# Altium PCB PCB2.PcbDoc (part 1 of 2)
Units mil, origin at the board's own origin, x right, y up, seen from the top; angles counter-clockwise.
Board outline 35165 x 15285 mil, 2 copper layers (Top Layer, Bottom Layer); 223 components, 120 nets, 681 pads, 228 vias.
Unrouted connection lines stored in the file: 6.
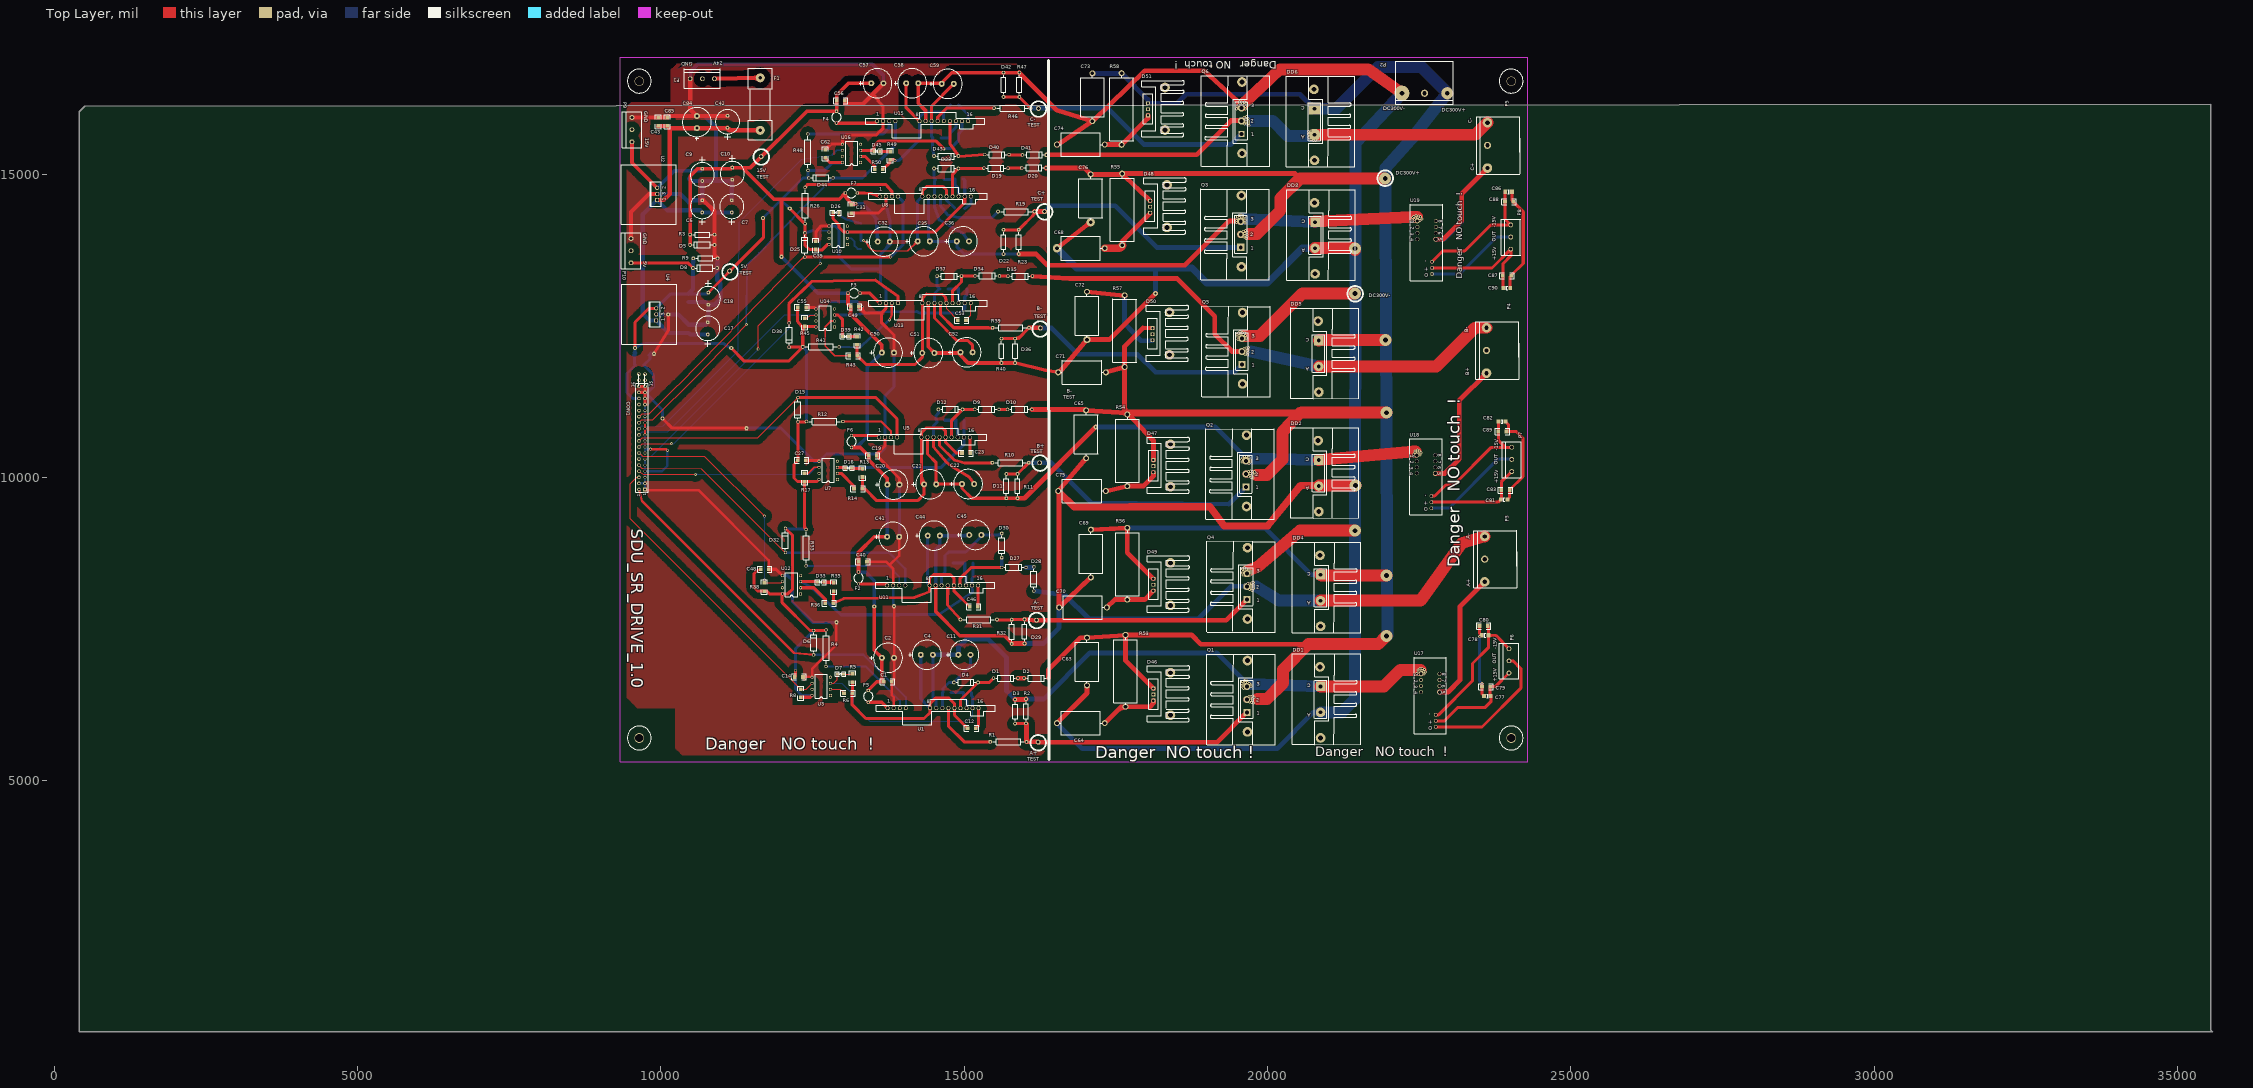
[diagram p0: Top Layer view]
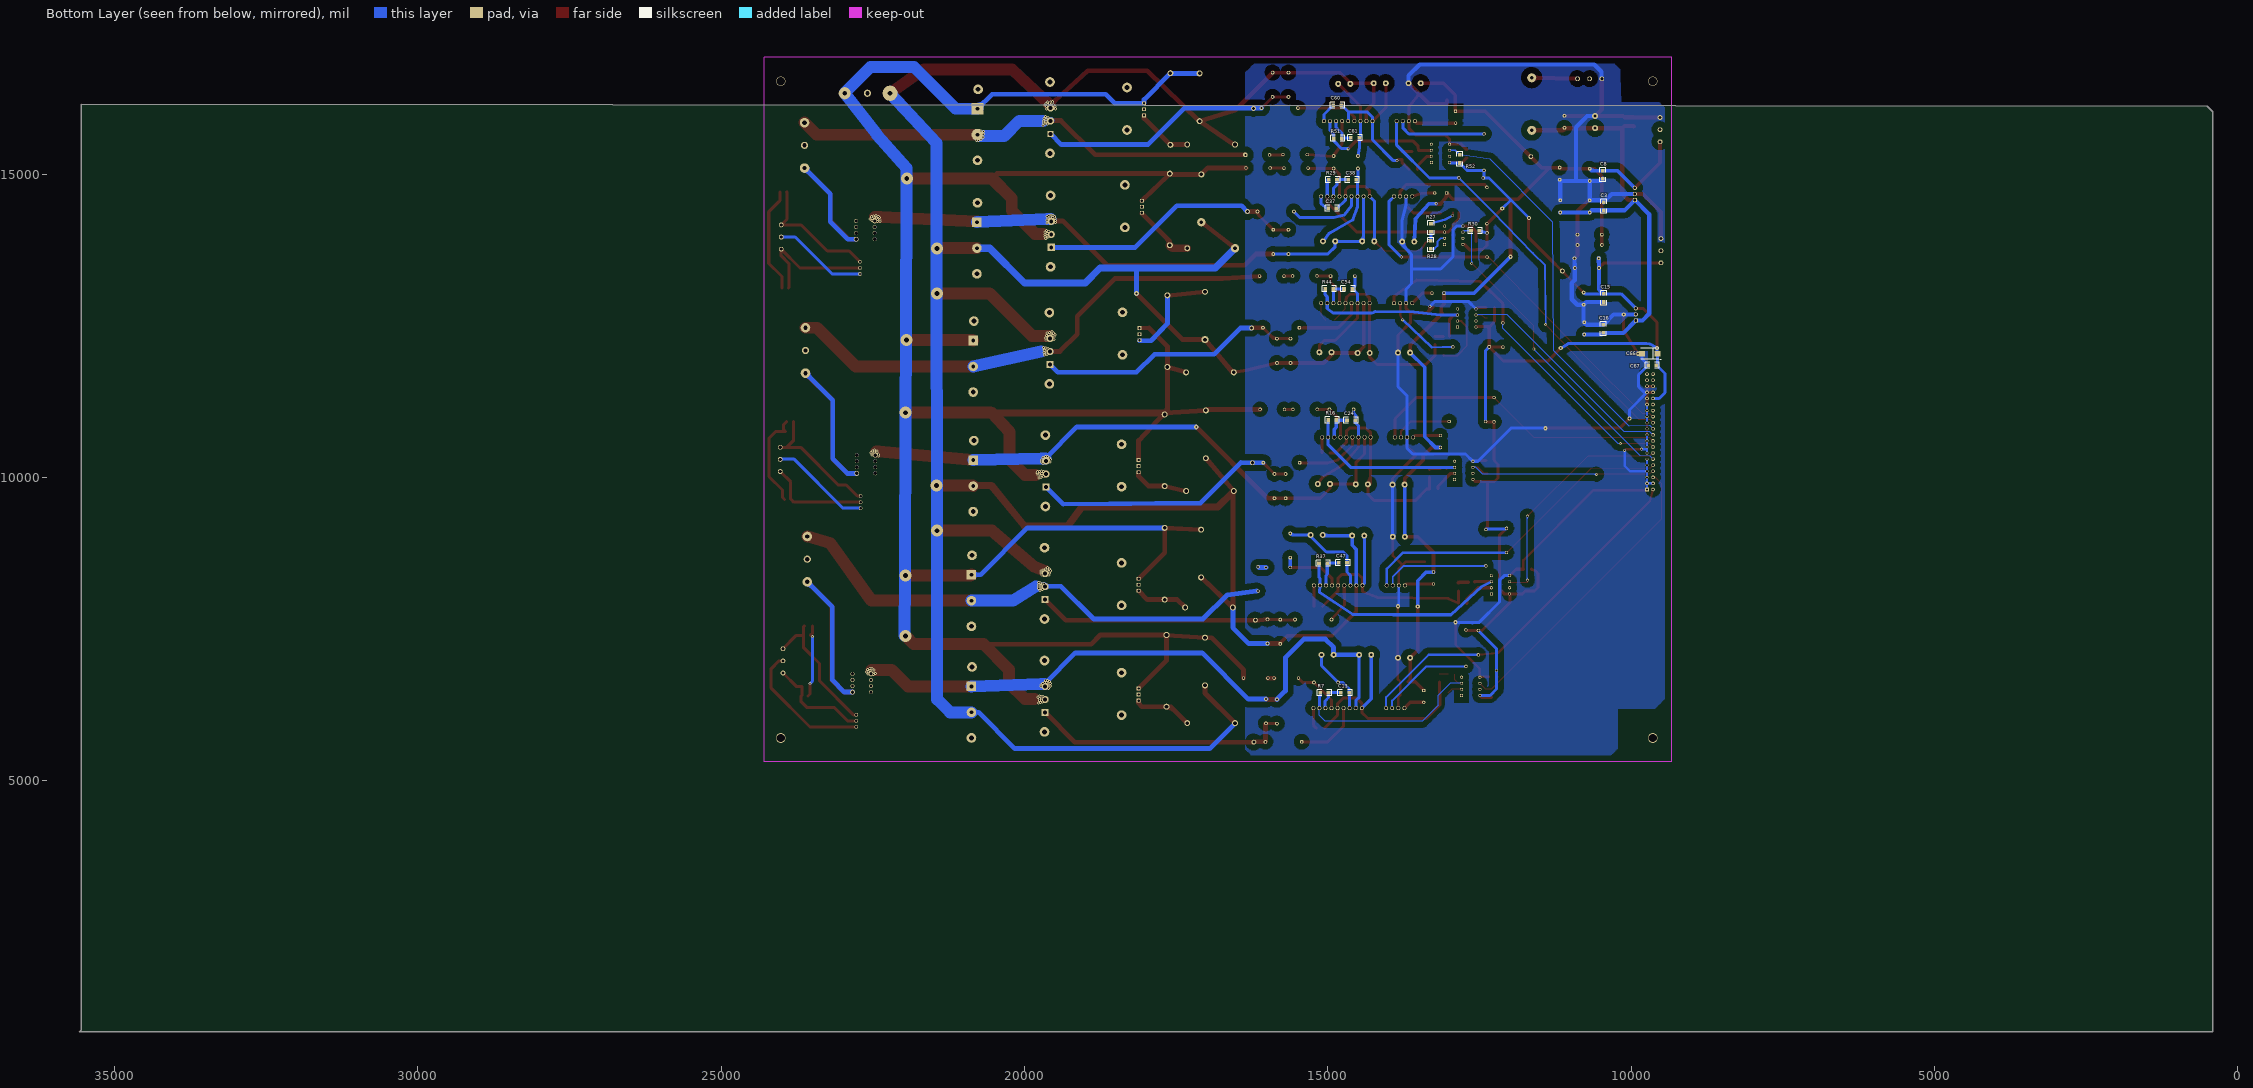
[diagram p1: Bottom Layer view, seen from below]

## Layer stack, top to bottom
Top Layer: signal copper 1.4
Dielectric: dielectric 12.6, FR-4, Dk 4.8
Bottom Layer: signal copper 1.4

## Board outline
505,16120 415,16030 415,865 35580,865 35550,895 35550,16150

## Design rules (kind name [scope] priority, off if disabled: settings)
Clearance [All] p1: gap=20
ComponentClearance [All] p1 off: gap=10 collisioncheckmode=3 verticalgap=10 showdistances=FALSE
HoleToHoleClearance [All] p1 off: gap=10 allowstackedmicrovias=TRUE
MinimumSolderMaskSliver [All] p1 off: minsoldermaskwidth=10
PlaneClearance [All] p1: clearance=30
PlaneConnect [All] p1: planeconnectstyle=Direct reliefexpansion=20 reliefentries=4 reliefconductorwidth=10 reliefairgap=10
PolygonConnect [All] p1: connectstyle=Direct reliefconductorwidth=10 reliefentries=4 polygonreliefangle="90 Angle" airgapwidth=10
RoutingVias [All] p1: holewidth=28 width=50 viastyle="Through Hole" minholewidth=28 minwidth=50 maxholewidth=50 maxwidth=100
SilkToSilkClearance [All] p1 off: silktosilkclearance=10
SilkToSolderMaskClearance SilkscreenOverComponentPads [IsPad] p1 off: minsilkscreentomaskgap=10 clearancetoexposedcopper=TRUE
SolderMaskExpansion [All] p1: expansion=4
UnConnectedPin [All] p1 off:
Width [All] p1: maxlimit=300 minlimit=10 preferedwidth=50 minimp=50.000000 maximp=50.000000 favimp=50.000000
21 further rules are at their usual default settings.

## Classes and differential pairs
component class main1: C63 C64 C65 C68 C69 C70 C71 C72 C73 C74 C75 C76 C77 C78 C79 C80 C81 C82 C83 C86 C87 C88 C89 C90 D46 D47 D48 D49 D50 D51 DD1 DD2 DD3 DD4 DD5 DD6 P2 P3 P4 P5 P6 P7 P8 Q1 Q2 Q3 Q4 Q5 Q6 R53 R54 R55 R56 R57 R58 U17 U18 U19
component class driveIII: C40 C41 C42 C43 C44 C45 C46 C47 C48 C49 C50 C51 C52 C53 C54 C55 C56 C57 C58 C59 C60 C61 C62 C66 C67 C84 C85 CON1 D27 D28 D29 D30 D32 D33 D34 D35 D36 D37 D38 D39 D40 D41 D42 D43 D44 D45 F1 F2 F3 F4 P1 R31 R32 R33 R35 R36 R37 R38 R39 R40 R41 R42 R43 R44 R45 R46 R47 R48 R49 R50 R51 R52 U11 U12 U13 U14 U15 U16
component class driveII: C1 C2 C3 C4 C6 C7 C8 C9 C10 C11 C12 C13 C14 C15 C16 C17 C18 C19 C20 C21 C22 C23 C24 C27 C31 C32 C35 C36 C37 C38 C39 D1 D2 D3 D4 D5 D6 D7 D8 D9 D10 D11 D12 D15 D16 D19 D20 D22 D23 D25 D26 F5 F6 F7 P9 P10 R1 R2 R3 R4 R5 R6 R7 R8 R9 R10 R11 R12 R13 R14 R16 R17 R19 R23 R26 R27 R28 R29 R30 U1 U2 U3 U4 U5 U7 U8 U10 U?

## Components (designator, comment, footprint, x,y, rotation, side; value= is the part's Value field where it differs from the comment)
C1 "Cap" 1206#1 13805,6635 r180 top
C2 "Cap Pol1" 电解电容1000uF#1 13645,7030 r0 top
C3 "Cap" 1206#1 10455,14540 r270 bottom
C4 "Cap Pol1" 电解电容1000uF#1 14285,7080 r0 top
C6 "Cap Pol1" 电解电容470uf 10685,14370 r270 top
C7 "Cap Pol1" 电解电容470uf 11170,14370 r270 top
C8 "Cap" 1206#1 10470,14925 r90 bottom
C9 "Cap Pol1" 电解电容470uf 10685,15090 r90 top
C10 "Cap Pol1" 电解电容470uf 11180,15110 r90 top
C11 "Cap Pol1" 电解电容1000uF#1 14905,7080 r0 top
C12 "预留" 1206#1 15055,5870 r0 top
C13 "预留" 1206#1 14650,6455 r0 bottom
C14 "Cap" 1206#1 12210,6715 r0 top
C15 "Cap" 1206#1 10455,12895 r90 bottom
C16 "Cap" 1206#1 10460,12520 r270 bottom
C17 "Cap Pol1" 电解电容470uf 10775,12360 r270 top
C18 "Cap Pol1" 电解电容470uf 10785,13050 r90 top
C19 "Cap" 1206#1 13560,10360 r180 top
C20 "Cap Pol1" 电解电容1000uF#1 13735,9885 r0 top
C21 "Cap Pol1" 电解电容1000uF#1 14340,9890 r0 top
C22 "Cap Pol1" 电解电容1000uF#1 14965,9895 r0 top
C23 "预留" 1206#1 14965,10405 r0 top
C24 "预留" 1206#1 14550,10945 r0 bottom
C27 "Cap" 1206#1 12255,10285 r0 top
C31 "Cap" 1206#1 13140,14360 r90 top
C32 "Cap Pol1" 电解电容1000uF#1 13575,13890 r0 top
C35 "Cap Pol1" 电解电容1000uF#1 14235,13895 r0 top
C36 "Cap Pol1" 电解电容1000uF#1 14880,13895 r0 top
C37 "预留" 1206#1 14860,14440 r0 bottom
C38 "预留" 1206#1 14530,14910 r0 bottom
C39 "Cap" 1206#1 12555,13760 r90 top
C40 "Cap" 1206#1 13400,8615 r180 top
C41 "Cap Pol1" 电解电容1000uF#1 13730,9025 r0 top
C42 "Cap Pol1" 电解电容470uf 11100,15765 r270 top
C43 "Cap" 1206#1 9960,15935 r270 top
C44 "Cap Pol1" 电解电容1000uF#1 14400,9045 r0 top
C45 "Cap Pol1" 电解电容1000uF#1 15085,9055 r0 top
C46 "预留" 1206#1 15090,7875 r0 top
C47 "预留" 1206#1 14685,8595 r0 bottom
C48 "Cap" 1206#1 11645,8490 r0 top
C49 "Cap" 1206#1 13265,12815 r180 top
C50 "Cap Pol1" 电解电容1000uF#1 13645,12060 r0 top
C51 "Cap Pol1" 电解电容1000uF#1 14310,12055 r0 top
C52 "Cap Pol1" 电解电容1000uF#1 14940,12065 r0 top
C53 "预留" 1206#1 14895,12595 r0 top
C54 "预留" 1206#1 14600,13110 r0 bottom
C55 "Cap" 1206#1 12260,12805 r0 top
C56 "Cap" 1206#1 13035,16215 r180 top
C57 "Cap Pol1" 电解电容1000uF#1 13470,16500 r0 top
C58 "Cap Pol1" 电解电容1000uF#1 14045,16500 r0 top
C59 "Cap Pol1" 电解电容1000uF#1 14630,16490 r0 top
C60 "预留" 1206#1 14775,16140 r0 bottom
C61 "预留" 1206#1 14485,15600 r0 bottom
C62 "Cap" 1206#1 12710,15270 r90 top
C63 "Cap" 无感电容15*6#1 17025,6575 r90 top
C64 "Cap" 无感电容15*6#1 16530,5955 r0 top
C65 "Cap" 无感电容15*6#1 17010,10320 r90 top
C66 "Cap Pol1" 7343 9695,12040 r0 bottom
C67 "Cap" 1206#1 9720,11855 r180 bottom
C68 "Cap" 无感电容15*6#2 16530,13780 r0 top
C69 "Cap" 无感电容15*6#1 17090,8355 r90 top
C70 "Cap" 无感电容15*6#1 16565,7860 r0 top
C71 "Cap" 无感电容15*6#1 16550,11735 r0 top
C72 "Cap" 无感电容15*6#3 17025,12275 r90 top
C73 "Cap" 无感电容15*6#1 17115,15875 r90 top
C74 "Cap" 无感电容15*6#1 16530,15490 r0 top
C75 "Cap" 无感电容15*6#1 16550,9780 r0 top
C76 "Cap" 无感电容15*6#2 17085,14210 r90 top
C77 "Cap Pol1" 1206#2 23625,6400 r180 top
C78 "Cap Pol1" 1206#2 23585,7400 r0 top
C79 "Cap" 1206#1 23535,6555 r0 top
C80 "Cap" 1206#1 23630,7555 r180 top
C81 "Cap Pol1" 1206#2 23900,9640 r0 top
C82 "Cap Pol1" 1206#2 23865,10925 r180 top
C83 "Cap" 1206#1 23990,9795 r180 top
C84 "Cap Pol1" 电解电容1000uF#2 10595,15760 r90 top
C85 "Cap" 1206#1 10110,15935 r270 top
C86 "Cap Pol1" 1206#2 23975,14710 r180 top
C87 "Cap" 1206#1 24015,13330 r180 top
C88 "Cap" 1206#1 23915,14545 r0 top
C89 "Cap" 1206#1 23805,10760 r0 top
C90 "Cap Pol1" 1206#2 23945,13125 r0 top
CON1 "Header 18X2" HDR2X18 9740,9805 r90 top
D1 "FR107" DIODE-0.4#1 15685,6695 r0 top
D2 "FR107" DIODE-0.4#1 16190,6695 r0 top
D3 "1.5KE18CA" AXIAL0.4 15840,6345 r270 top
D4 "1N4751" DIODE0.4 14830,6625 r0 top
D5 "Diode 1N4007" DIODE0.4 10885,13835 r180 top
D6 "Diode 1N4007" DIODE-0.4#1 12520,7280 r90 top
D7 "LED" 0805D 12985,6715 r180 top
D8 "Diode 1N4007" DIODE0.4 10930,13455 r180 top
D9 "FR107" DIODE-0.4#1 15375,11125 r0 top
D10 "FR107" DIODE-0.4#1 15915,11125 r0 top
D11 "1.5KE18CA" AXIAL0.4 15695,9660 r90 top
D12 "1N4751" DIODE0.4 14575,11125 r0 top
D15 "Diode 1N4007" DIODE-0.4#1 12260,11120 r270 top
D16 "LED" 0805D 13120,10110 r180 top
D19 "FR107" DIODE-0.4#1 15525,15100 r0 top
D20 "FR107" DIODE-0.4#1 16150,15105 r0 top
D22 "1.5KE18CA" AXIAL0.4 15650,13685 r90 top
D23 "1N4751" DIODE0.4 14505,15095 r0 top
D25 "Diode 1N4007" DIODE-0.4#1 12375,13835 r90 top
D26 "LED" 0805D 12910,14320 r180 top
D27 "FR107" DIODE-0.4#1 15820,8520 r0 top
D28 "FR107" DIODE-0.4#1 16150,8330 r270 top
D29 "1.5KE18CA" AXIAL0.4 15995,7265 r90 top
D30 "1N4751" DIODE0.4 15620,9080 r270 top
D32 "Diode 1N4007" DIODE-0.4#1 12055,8965 r90 top
D33 "LED" 0805D 12660,8230 r180 top
D34 "FR107" DIODE-0.4#1 15380,13325 r0 top
D35 "FR107" DIODE-0.4#1 15925,13320 r0 top
D36 "1.5KE18CA" AXIAL0.4 15840,11890 r90 top
D37 "1N4751" DIODE0.4 14555,13320 r0 top
D38 "Diode 1N4007" DIODE-0.4#1 12115,12350 r270 top
D39 "LED" 0805D 13070,12280 r180 top
D40 "FR107" DIODE-0.4#1 15540,15325 r0 top
D41 "FR107" DIODE-0.4#2 16160,15320 r0 top
D42 "1.5KE18CA" AXIAL0.4 15650,16675 r270 top
D43 "1N4751" DIODE0.4 14505,15300 r0 top
D44 "Diode 1N4007" DIODE-0.4#1 12640,14940 r180 top
D45 "LED" 0805D 13585,15330 r180 top
D46 "MUR860 8A/600V" TO-220_SANRE 18120,6525 r180 top
D47 "MUR860 8A/600V" TO-220_SANRE 18120,10290 r180 top
D48 "MUR860 8A/600V" TO-220_SANRE 18065,14565 r180 top
D49 "MUR860 8A/600V" TO-220_SANRE 18120,8335 r180 top
D50 "MUR860 8A/600V" TO-220_SANRE 18105,12465 r180 top
D51 "MUR860 8A/600V" TO-220_SANRE 18030,16170 r180 top
DD1 "RURG8060" TO247dio#1 20865,6560 r180 top
DD2 "RURG8060" TO247dio#1 20835,10290 r180 top
DD3 "RURG8060" TO247dio#1 20775,14210 r180 top
DD4 "RURG8060" TO247dio#1 20865,8400 r180 top
DD5 "RURG8060" TO247dio#1 20835,12260 r180 top
DD6 "RURG8060" TO247dio#2 20765,16080 r180 top
F1 "Fuse 1　4A" FUSE 11640,16590 r270 top
F2 "Fuse 1　2A" CAPR5-4X5 13260,8345 r270 top
F3 "Fuse 1　2A" CAPR5-4X5 13185,13040 r0 top
F4 "Fuse 1　2A" CAPR5-4X5 12895,15940 r270 top
F5 "Fuse 1　2A" CAPR5-4X5 13420,6395 r270 top
F6 "Fuse 1　2A" CAPR5-4X5 13145,10595 r90 top
F7 "Fuse 1　2A" CAPR5-4X5 13140,14690 r0 top
P1 "Header 3" PHENOX-3 10485,16575 r0 top
P2 "Header 3" 端子9.5mm-3#1 22925,16705 r180 top
P3 "Header 3" 端子9.5mm-3#2 23950,8320 r90 top
P4 "Header 3" 端子9.5mm-3#2 23980,11760 r90 top
P5 "Header 3" 端子9.5mm-3#3 23995,15140 r90 top
P6 "SEN_A" PHENOX-3 23980,6780 r90 top
P7 "SEN_B" PHENOX-3 24025,10100 r90 top
P8 "SEN_C" PHENOX-3 24010,13765 r90 top
P9 "预留不焊" PHENOX-3 9525,15535 r90 top
P10 "预留不焊" PHENOX-3 9510,13540 r90 top
Q1 "IGBT-N" TO247#1 19660,6130 r0 top
Q2 "IGBT-N" TO247#1 19645,9845 r0 top
Q3 "IGBT-N" TO247#2 19560,13795 r0 top
Q4 "IGBT-N" TO247#3 19660,7990 r0 top
Q5 "IGBT-N" TO247#1 19580,11865 r0 top
Q6 "IGBT-N" TO247#4 19570,15665 r0 top
R1 "5R" AXIAL0.6 15430,5645 r0 top
R2 "10K" AXIAL0.4 16020,6350 r270 top
R3 "Res2" AXIAL0.4 10885,14005 r180 top
R4 "100R" AXIAL-0.6#1 12725,7190 r90 top
R5 "Res2" 1206#1 13160,6765 r270 top
R6 "Res2" 1206#1 13020,6445 r0 top
R7 "预留" 1206#1 15125,6455 r180 bottom
R8 "Res2" 1206#1 12305,6515 r270 top
R9 "Res2" AXIAL0.4 10935,13615 r180 top
R10 "5R" AXIAL0.6 15465,10245 r0 top
R11 "10K or更大？33k？" AXIAL0.4 15880,9660 r90 top
R12 "Res2" AXIAL-0.6#1 12700,10925 r180 top
R13 "Res2" 1206#1 13325,10145 r270 top
R14 "Res2" 1206#1 13185,9815 r0 top
R16 "预留" 1206#1 14995,10950 r180 bottom
R17 "Res2" 1206#1 12370,10070 r270 top
R19 "5R" AXIAL0.6 15560,14385 r0 top
R23 "10K or更大？33k？" AXIAL0.4 15900,13685 r90 top
R26 "Res2" AXIAL-0.6#1 12380,14485 r270 top
R27 "Res2" 1206#1 13300,14185 r270 bottom
R28 "Res2" 1206#1 13305,13770 r90 bottom
R29 "预留" 1206#1 14985,14910 r180 bottom
R30 "Res2" 1206#1 12640,14070 r180 bottom
R31 "5R" AXIAL0.6 14940,7660 r0 top
R32 "10K or更大？33k？" AXIAL0.4 15785,7260 r90 top
R33 "Res2" AXIAL-0.6#1 12395,8845 r90 top
R35 "Res2" 1206#1 12850,8265 r270 top
R36 "Res2" 1206#1 12710,7930 r0 top
R37 "预留" 1206#1 15145,8590 r180 bottom
R38 "Res2" 1206#1 11705,8265 r270 top
R39 "5R" AXIAL0.6 15470,12470 r0 top
R40 "10K or更大？33k？" AXIAL0.4 15615,11890 r90 top
R41 "Res2" AXIAL-0.6#2 12640,12155 r180 top
R42 "Res2" 1206#1 13235,12325 r270 top
R43 "Res2" 1206#1 13105,12010 r0 top
R44 "预留" 1206#1 15045,13110 r180 bottom
R45 "Res2" 1206#1 12375,12625 r270 top
R46 "5R" AXIAL0.6 15495,16090 r0 top
R47 "10K or更大？33k？" AXIAL0.4 15910,16675 r270 top
R48 "Res2" AXIAL-0.6#1 12425,15365 r270 top
R49 "Res2" 1206#1 13780,15375 r270 top
R50 "Res2" 1206#1 13525,15080 r0 top
R51 "预留" 1206#1 14905,15590 r180 bottom
R52 "Res2" 1206#1 12825,15320 r270 bottom
R53 "5.2R" 水泥电阻22*9.5 17660,6225 r90 top
R54 "5.2R" 水泥电阻22*9.5 17690,9860 r90 top
R55 "5.2R" 水泥电阻22*9.5 17605,13830 r90 top
R56 "5.2R" 水泥电阻22*9.5 17690,7990 r90 top
R57 "5.2R" 水泥电阻22*9.5 17645,13005 r270 top
R58 "5.2R" 水泥电阻22*9.5 17595,15485 r90 top
U1 "QP12W05KS-37" QP12W05KS37 13390,5700 r0 top
U2 "L7815CV" TO220ABN 9940,14675 r90 top
U3 "TLP550" DIP8 12795,6410 r180 top
U4 "L7805CV" TO220ABN 9925,12690 r90 top
U5 "QP12W05KS-37" QP12W05KS37 13245,10165 r0 top
U7 "TLP550" DIP8 12910,9970 r180 top
U8 "QP12W05KS-37" QP12W05KS37 13260,14135 r0 top
U10 "TLP550" DIP8 13075,13845 r180 top
U11 "QP12W05KS-37" QP12W05KS37 13380,7725 r0 top
U12 "TLP550" DIP8 12305,8085 r180 top
U13 "QP12W05KS-37" QP12W05KS37 13260,12375 r0 top
U14 "TLP550" DIP8 12860,12480 r180 top
U15 "QP12W05KS-37" QP12W05KS37 13215,15375 r0 top
U16 "TLP550" DIP8 13295,15195 r180 top
U17 "电流传感器1" 电流传感器1 22530,6765 r270 top
U18 "电流传感器1" 电流传感器1 22460,10370 r270 top
U19 "电流传感器1" 电流传感器1 22470,14230 r270 top

## Footprints (in the part's own frame and the unit in brackets; to place one, negate y for a bottom-side part, rotate by r counter-clockwise, add the part's x,y. Pads: shape width x height; smd on the part's side, far side on the other; paste and mask are expansions set on the pad)
0805D [mil]
  rect 50x50 smd: A(-27,-48) K(73,-48)
  silkscreen extent -67,-88 113,-8
1206#1 [mil]
  rect 60x60 smd: 1(0,0) 2(135,0)
  silkscreen extent -50,-50 185,50
1206#2 [mil] "Chip Capacitor; Body 3.2 x 1.6 mm (LxW typ)"
  rect 62.99x70.87 smd: 1(-55.12,0) 2(55.12,0)
  silkscreen extent -12,-31 12,31
7343 [mm] "Capacitor, SM Tantalum; Body 7.3 x 4.3 mm (LxW typ)"
  rect 2.6x2.4 smd: 1(-3.2,0) 2(3.2,0)
  silkscreen extent -4.57,-2.3 3.8,2.42
AXIAL0.4 [mil]
  round 62 hole 32: 1(0,0) 2(400,0)
  silkscreen extent 40,-40 360,40
AXIAL0.6 [mil]
  round 62 hole 32: 1(0,0) 2(600,0)
  silkscreen extent 40,-50 560,50
AXIAL-0.6#1 [mm] "Axial Device, Thru-Hole; 2 Leads; 0.6 in Pin Spacing"
  round 1.4 hole 0.85: 1(-7.62,0) 2(7.62,0)
  silkscreen extent -6.6,-1.27 6.6,1.27
AXIAL-0.6#2 [mm] "Axial Device, Thru-Hole; 2 Leads; 0.6 in Pin Spacing"
  round 1.4 hole 0.85: 1(-7.62,0)
  round 1.651 hole 0.85: 2(7.62,0)
  silkscreen extent -6.6,-1.27 6.6,1.27
CAPR5-4X5 [mm] "Capacitor; 2 Leads"
  rect 1.35x1.35 hole 0.8: 1(-2.5,0)
  round 1.35 hole 0.8: 2(2.5,0)
  silkscreen extent -1.69,-2 1.82,2
DIODE0.4 [mil]
  round 62 hole 32: A(0,0) K(400,0)
  silkscreen extent 40,-50 360,50
DIODE-0.4#1 [mm] "Diode, Thru-Hole; 2 Leads; 0.4 in Pin Spacing"
  round 1.4 hole 0.85: 1(-5.08,0) 2(5.08,0)
  silkscreen extent -4.06,-1.27 4.06,1.27
DIODE-0.4#2 [mm] "Diode, Thru-Hole; 2 Leads; 0.4 in Pin Spacing"
  round 1.4 hole 0.85: 1(-5.08,0)
  round 2 hole 0.85: 2(5.08,0)
  silkscreen extent -4.06,-1.27 4.06,1.27
DIP8 [mil]
  rect 50x50 hole 32: 1(0,0)
  round 50 hole 32: 2(0,-100) 3(0,-200) 4(0,-300) 5(300,-300) 6(300,-200) 7(300,-100) 8(300,0)
  silkscreen extent 50,-350 250,50
FUSE [mm]
  round 3.81 hole 1.5: 1(0,0) 2(22,0)
  silkscreen extent -4,-5 26,5
HDR2X18 [mm] "Connector; Header; 18x2 Position"
  rect 1.5x1.5 hole 0.9: 1(0,0)
  round 1.5 hole 0.9: 2(0,2.54) 3(2.54,0) 4(2.54,2.54) 6(5.08,2.54) 8(7.62,2.54) 10(10.16,2.54) 12(12.7,2.54) 14(15.24,2.54) 16(17.78,2.54) 18(20.32,2.54) 20(22.86,2.54) 22(25.4,2.54) 24(27.94,2.54) 26(30.48,2.54) 28(33.02,2.54) 29(35.56,0) 30(35.56,2.54) 31(38.1,0) 32(38.1,2.54) 33(40.64,0) 34(40.64,2.54) 35(43.18,0) 36(43.18,2.54)
  round 1.143 hole 0.9: 5(5.08,0) 7(7.62,0) 9(10.16,0) 11(12.7,0) 13(15.24,0) 15(17.78,0) 17(20.32,0) 19(22.86,0) 21(25.4,0) 23(27.94,0) 25(30.48,0) 27(33.02,0)
  silkscreen extent -1.27,-1.27 44.45,3.81
PHENOX-3 [mm]
  round 2 hole 1.3: 1(0,0) 2(5.08,0) 3(10.16,0)
  silkscreen extent -2.54,-4.06 12.5,4.06
QP12W05KS37 [mm] "IGBT Drive"
  round 1.7 hole 1.3: 1(8.89,12.7) 2(11.43,12.7) 3(13.97,12.7) 4(16.51,12.7) 8(26.67,12.7) 9(29.21,12.7) 10(31.75,12.7) 11(34.29,12.7) 12(36.83,12.7) 13(39.37,12.7) 14(41.91,12.7) 15(44.45,12.7) 16(46.99,12.7)
  silkscreen extent 4.19,5.71 53.97,16.51
TO220ABN [mm] "TO, Thru-Hole, Vertical, Heatsink Mounted; 3 In-Line Leads; Pitch 2.54 mm; Pin sequence 1, 3, 2"
  rect 1.7x1.7 hole 1.1: 1(-2.54,0)
  round 1.7 hole 1.1: 2(2.54,0) 3(0,0)
  silkscreen extent -5.2,-1.7 5.2,2.9
TO247#1 [mm]
  rect 3x3 hole 1.6: 1(0,0)
  round 3 hole 1.6: 2(0,5.44) 3(0,10.88)
  round 4.064 hole 2.032: ""(0.254,-8.128) ""(0.254,21.717)
  silkscreen extent -16.76,-13.69 11.81,24.44
TO247#2 [mm]
  rect 3.04x3.04 hole 1.6: 1(0,0)
  round 3.04 hole 1.6: 2(0,5.44) 3(0,10.88)
  round 4.064 hole 2.032: ""(0.254,-8.128) ""(0.254,21.717)
  silkscreen extent -16.76,-13.69 11.81,24.44
TO247#3 [mm]
  rect 3x3 hole 1.6: 1(0,0)
  round 3 hole 1.6: 2(0,5.44)
  round 3.048 hole 1.6: 3(0,10.88)
  round 4.064 hole 2.032: ""(0.254,-8.128) ""(0.254,21.717)
  silkscreen extent -16.76,-13.69 11.81,24.44
TO247#4 [mm]
  rect 2.4x2.4 hole 1.6: 1(0,0)
  round 3.048 hole 1.6: 2(0,5.44) 3(0,10.88)
  round 4.064 hole 2.032: ""(0.254,-8.128) ""(0.254,21.717)
  silkscreen extent -16.76,-13.69 11.81,24.44
TO247dio#1 [mil]
  round 157.48 hole 62.99: A(-10,428.35)
  rect 157.48x157.48 hole 62.99: C(-10,0)
  round 160 hole 80: ""(-10,850) ""(0,-320)
  silkscreen extent -670,-539 455,962
TO247dio#2 [mil]
  round 196.85 hole 62.99: A(-10,428.35)
  rect 196.85x196.85 hole 62.99: C(-10,0)
  round 160 hole 80: ""(-10,850) ""(0,-320)
  silkscreen extent -670,-539 455,962
TO-220_SANRE [mil]
  rect 62x62 hole 39.37: 1(0,0) 2(0,100) 3(0,200)
  round 160 hole 80: ""(-280,440) ""(-280,-260)
  silkscreen extent -600,-375 105,550
无感电容15*6#1 [mm]
  round 2.5 hole 1.5: 1(0,0) 2(20,0)
  silkscreen extent 1.02,-5 18.92,5
无感电容15*6#2 [mm]
  round 3.5 hole 1.5: 1(0,0)
  round 2.5 hole 1.5: 2(20,0)
  silkscreen extent 1.02,-5 18.92,5
无感电容15*6#3 [mm]
  round 3 hole 1.5: 1(0,0)
  round 2.5 hole 1.5: 2(20,0)
  silkscreen extent 1.02,-5 18.92,5
水泥电阻22*9.5 [mm]
  round 2.5 hole 1.5: 1(0,0) 2(30,0)
  silkscreen extent 0.89,-5 28.83,5
电流传感器1 [mm]
  round 1.5 hole 1: 0(22.2,6.15) A(19.66,6.15) C(17.12,6.15)
  round 2 hole 1.4: 1(0,0) 5(7.62,7.75)
  round 1.6 hole 1.4: 2(2.54,0) 3(5.08,0) 4(7.62,0) 6(5.08,7.75) 7(2.54,7.75) 8(0,7.75)
  silkscreen extent -6.9,-2.92 25.02,10.67
电解电容470uf [mil] "5.04mm"
  round 62 hole 28: 1(0,0) 2(-200,0)
  silkscreen extent -300,-200 200,200
电解电容1000uF#1 [mm]
  round 2.5 hole 1.1: 1(0,0) 2(5.08,0)
  silkscreen extent -5.08,-6.1 8.64,6.1
电解电容1000uF#2 [mm]
  round 2.5 hole 1.2: 1(0,0) 2(5.08,0)
  silkscreen extent -5.08,-6.1 8.64,6.09
端子9.5mm-3#1 [mm]
  round 5.08 hole 2: 1(-0.966,9.398)
  round 3 hole 1.8: 2(8.534,9.398)
  round 6.35 hole 2: 3(18.034,9.398)
  silkscreen extent -3.47,-4.1 20.59,13.9
端子9.5mm-3#2 [mm]
  round 4 hole 1.8: 1(-0.966,9.398) 3(18.034,9.398)
  round 3 hole 1.8: 2(8.534,9.398)
  silkscreen extent -3.47,-4.1 20.59,13.9
端子9.5mm-3#3 [mm]
  round 4 hole 1.8: 1(-0.966,9.398)
  round 3 hole 1.8: 2(8.534,9.398)
  round 4 hole 2: 3(18.034,9.398)
  silkscreen extent -3.47,-4.1 20.59,13.9

## Part data
C1 C3 C8 C14 C15 C16 C19 C27 C31 C39 C40 C43 C48 C49 C55 C56 C62 C63 C64 C65 C67 C68 C69 C70 C71 C72 C73 C74 C75 C76 C79 C80 C83 C85 C87 C88 C89: "Capacitor"
C2 C4 C6 C7 C9 C10 C11 C17 C18 C20 C21 C22 C32 C35 C36 C41 C42 C44 C45 C50 C51 C52 C57 C58 C59 C66 C77 C78 C81 C82 C84 C86 C90: "Polarized Capacitor (Radial)"
C12 C23 C37 C46 C53 C60: library part Cap
C13 C24 C38 C47 C54 C61: library part Cap, "Capacitor"
CON1: "Header, 18-Pin, Dual row"
D1 D2 D5 D6 D8 D9 D10 D15 D19 D20 D25 D27 D28 D32 D34 D35 D38 D40 D41 D44 D46 D47 D48 D49 D50 D51 DD1 DD2 DD3 DD4 DD5 DD6: library part "Diode 1N4148", "High Conductance Fast Diode"
D3 D11 D22 D29 D36 D42: library part D-SMBJ5.0CA, "TVS 18V"
D4 D12 D23 D30 D37 D43: library part ZENER1, "Zener Diode 30V"
D7 D16 D26 D33 D39 D45: library part DIODE1
F1 F2 F3 F4 F5 F6 F7: library part "Fuse 1", "Fuse"
P1 P2 P3 P4 P5: "Header, 3-Pin"
P6 P7 P8 P9 P10: library part "Header 3", "Header, 3-Pin"
Q1 Q2 Q3 Q4 Q5 Q6: "Insulated Gate Bipolar Transistor (N-Channel)"
R1 R2 R4 R7 R10 R11 R16 R19 R23 R29 R31 R32 R37 R39 R40 R44 R46 R47 R51 R53 R54 R55 R56 R57 R58: library part Res2, "Resistor"
R3 R5 R6 R8 R9 R12 R13 R14 R17 R26 R27 R28 R30 R33 R35 R36 R38 R41 R42 R43 R45 R48 R49 R50 R52: "Resistor"
U2: "Positive Voltage Regulator"
U3 U7 U10 U12 U14 U16: library part HCPL4053
U4: library part L7815CV, "Positive Voltage Regulator"

## Free pads (board coordinates)
  round 60 hole 35.43: 0(9639.97,11705.13) 0(9639.98,11605) 0(9739.97,11705.13) 0(9739.98,11605)
  round 80 hole 50: 0(11135,13405) 0(11655,15290) 0(16195,7650) 0(16220,5640) 0(16225,16085) 0(16245,10245) 0(16255,12465) 0(16325,14385)

## Via types
v1: diameter 50, hole 11.81, Top Layer to Bottom Layer, 181 vias
v2: diameter 50, hole 28, Top Layer to Bottom Layer, 18 vias
v3: diameter 70, hole 28, Top Layer to Bottom Layer, 12 vias
v4: diameter 196.85, hole 78.74, Top Layer to Bottom Layer, 9 vias
v5: diameter 157.48, hole 137.8, Top Layer to Bottom Layer, 4 vias
v6: diameter 50, hole 23.62, Top Layer to Bottom Layer, 2 vias
v7: diameter 78.74, hole 28, Top Layer to Bottom Layer, 1 vias
v8: diameter 86.61, hole 28, Top Layer to Bottom Layer, 1 vias

## Nets (pads, with @x,y where several pads share a name; then routed paths per layer and width w, separated by ;. In a path a pad name is that pad's centre, name@x,y a point inside that pad or via, vN(x,y) a via of type N, cw(c..) or ccw(c..) an arc to the next point about the centre after c; other vN are vias at no path point)
+5V: C14.1 C15.2 C18.1 C27.1 C39.1 C48.1 C55.1 C62.1 C66.1 C67.2 CON1.32 D6.2 D8.K D15.2 D25.2 D32.2 D38.2 D44.2 P10.1 pad.0@11135,13405 R4.2 R8.2 R9.2 R12.2 R17.2 R26.2 R30.2 R33.2 R38.2 R41.2 R45.2 R48.2 R52.2 U3.8 U4.2 U7.8 U10.8 U12.8 U14.8 U16.8 | length 23346.8
  Top Layer w50: P10.1@9510,13540 10445,13540 D8.K@10530,13455 ; v3(9575,12135) 9575,12560 9805,12790 U4.2@9925,12790 ; C18.1@10785,13050 11690,13955 v3@11690,14290 ; v3(11160,12135) 11375,11920 12105,11920 R41.2@12335,12150 ; C48.1@11645,8490 11570,8461.88 11535,8415 11535,8190 11595,8130 R38.2@11705,8130 11750,8130 11800,8080 U12.8@12000,8080 ; v3@11677.93,14272.93 cw(c11648.79,14243.79) 11690,14243.79 ; D32.2@12065,9155 12175,9045 12175,8165 12095,8085 U12.8@12005,8085 U12.8@12000,8080 ; D38.2@12115,12150 R41.2@12335,12150 ; v3(12125,14435) 12375,14185 R26.2@12380,14185 D25.2@12375,14035 12375,13835 12450,13760 C39.1@12555,13760 12565,13750 12655,13750 12750,13845 U10.8@12775,13845 ; C14.1@12210,6715 12220,6725 v2(12220,6820) ; C55.1@12250,12805 12250,12580 12320,12490 R45.2@12375,12490 ; R8.2@12305,6380 12465,6380 U3.8@12495,6410 ; 12370,9211.53 ccw(c12461.53,9211.53) R33.2@12396.81,9146.81 ; R33.2@12395,9145 12370,9170 R17.2@12370,9935 ; R12.2@12400,10935 12385,10920 D15.2@12260,10920 12260,10290 C27.1@12255,10285 12255,10275 12195,10215 12195,9995 12255,9935 R17.2@12370,9935 ; U14.8@12560,12480 12550,12490 R45.2@12375,12490 ; U7.8@12610,9970 12575,9935 R17.2@12370,9935 ; 12694.68,7480 ccw(c12694.68,7520.32) R4.2@12723.19,7491.81 ; C62.1@12710,15270 12785,15195 U16.8@12995,15195 ; R4.2@12725,7490 12715,7480 D6.2@12520,7480 12460,7480 12000,7940 U12.8@12000,8080 ; R41.2@12335,12150 R41.2@12340,12155 12340,12455 R45.2@12375,12490 ; 11105.86,13370.86 ccw(c11071.72,13405) 11120,13405 cw(c11071.72,13405) 11105.86,13370.86 ; pad.0@11135,13420 ccw(c11135,13468.28) 11169.14,13434.14 cw(c11135,13468.28) pad.0@11135,13420
  Bottom Layer w50: C66.1@9549.35,12024.27 cw(c9513.94,11988.86) 9564.02,11988.86 ; C66.1@9557.22,12055.73 ccw(c9514.31,12098.64) 9575,12098.64 ; 9564.02,11983.73 cw(c9621.35,11983.73) C66.1@9580.81,12024.27 ; C66.1@9569.02,12040 C66.1@9564.02,12045 ; 9575,12088.76 ccw(c9621.71,12088.76) C66.1@9588.68,12055.73 ; CON1.32@9640,11305 9540,11305 9445,11400 9445,11715 C67.2@9585,11855 9564.02,11875.98 C66.1@9564.02,12045 ; U4.2@9925,12790 10165,13030 C15.2@10455,13030 10765,13030 C18.1@10785,13050 ; v3(11160,12135) 11035,12210 9750,12210 9695,12205 v3(9575,12135) 9575,12055.98 C66.1@9564.02,12045 ; v3(11685,14280) 11982.5,14577.5 ; D32.2@12055,9165 12065,9155 R33.2@12395,9155 ; D32.2@12056.81,9166.81 ccw(c12085.32,9195.32) 12085.32,9155 ; v3(12125,14435) 11982.5,14577.5 ; R41.2@12340,12155 12400,12095 R12.2@12400,10925 ; 12364.68,9155 cw(c12364.68,9114.68) R33.2@12393.19,9143.19 ; D25.2@12380,14030 R30.2@12505,14070 ; 12425,14982.39 ccw(c12482.39,14982.39) D44.2@12441.81,14941.81 ; U3.8@12495,6410 12325,6410 12220,6515 v2(12220,6820) 12220,7180 D6.2@12520,7480 ; U16.8@12995,15195 12985,15185 R52.2@12825,15185 12705,15065 R48.2@12425,15065 12425,14955 D44.2@12440,14940 12345,14940 11982.5,14577.5
  Bottom Layer w70: C15.2@10455,13030 10530,13105 D8.K@10530,13455 R9.2@10535,13615
+15V: C1.2 C2.1 C8.2 C9.1 C10.1 C19.2 C20.1 C31.2 C32.1 C40.2 C41.1 C49.2 C50.1 C56.2 C57.1 D5.K F2.1 F3.1 F4.1 F5.1 F6.1 F7.1 P9.1 pad.0@11655,15290 R3.2 U2.2 | length 20368.2
  Top Layer w60: P9.1@9525,15535 9525,15190 U2.2@9940,14775 ; D5.K@10485,13835 R3.2@10485,14005 10485,14970 10605,15090 C9.1@10685,15090 11160,15090 C10.1@11180,15110 11345,15110 ; 11129.3,15090 ccw(c11129.3,15160.7) C10.1@11179.29,15110.71 ; v3@11990,13635 v3(11990,13640) 11990,14590 ; F3.1@13086.57,13040 13086.57,12858.43 C49.2@13130,12815 13130,12715.71 13120,12705.71 13645,12180.71 C50.1@13645,12060 ; F6.1@13145,10496.57 13288.43,10496.57 C19.2@13425,10360 13425,10295 13735,9985 C20.1@13735,9885 ; v2(13215,14515) 13210,14510 13140,14510 13046.57,14628.43 F7.1@13041.57,14690 12941.57,14590 11990,14590 ; F2.1@13260,8443.43 13260,8765 13520,9025 C41.1@13730,9025 ; F5.1@13420,6493.43 13561.58,6635 C1.2@13670,6635 13645,6660 C2.1@13645,7030 13520,7155 v3(13520,7875) ; C57.1@13470,16500 13095,16500 12900,16305 C56.2@12900,16215 12900,16043.42 F4.1@12895,16038.43 12408.43,16038.43 11480,15110 11345,15110 ; 11345,15110 11865,14590 11990,14590
  Bottom Layer w60: U2.2@9940,14775 10225,15060 C8.2@10470,15060 10655,15060 C9.1@10685,15090 ; 10610.16,15060 ccw(c10610.16,15164.84) C9.1@10684.29,15090.71 ; v3(11990,13640) 12590,13040 F3.1@13086.57,13040 ; F6.1@13145,10496.57 13226.57,10496.57 13405,10675 13405,11820 C50.1@13645,12060 ; v2(13215,14515) 13335,14515 13555,14265 C32.1@13575,13890 ; F2.1@13260,8443.43 13376.57,8443.43 13520,8300 v3(13520,7875) ; C41.1@13716.41,9038.59 ccw(c13671.55,9083.45) 13735,9083.45 ; C41.1@13730,9025 13735,9030 C20.1@13735,9885
+15V_C: C77.1 C79.2 C81.1 C83.2 C87.2 C90.1 P6.1 P7.1 P8.1 U17.A U18.A U19.A | length 5514.8
  Top Layer w50: U18.A@22702.13,9595.98 23800.87,9595.98 C81.1@23844.88,9640 23855,9650.12 C83.2@23855,9795 23855,9930 P7.1@24025,10100 ; U19.A@22712.13,13455.98 23700.98,13455.98 P8.1@24010,13765 24010,13655 23880,13525 C87.2@23880,13330 23880,13134.88 C90.1@23889.88,13125 ; U17.A@22772.13,5990.98 22915.98,5990.98 23140,6215 23590,6215 23680.12,6305.12 C77.1@23680.12,6400 23670,6410.12 C79.2@23670,6555 23755,6555 P6.1@23980,6780
+24V: C3.2 C6.1 C7.1 C16.2 C17.1 C42.1 C43.2 C84.1 C85.2 F1.2 U2.1 U4.1 | length 7869
  Top Layer w70: U2.1@9940,14575 10050,14575 10150,14675 10150,15760 ; C43.2@9960,15790 9970,15795 10110,15795 10150,15760 ; C42.1@11096.02,15764.59 ccw(c11141.14,15769.21) 11141.14,15723.86 ; C42.1@11097.17,15762.17 ccw(c11189.67,15854.67) 11189.67,15723.86 ; F1.2@11611.72,15695.57 ccw(c11543.43,15627.29) 11543.43,15723.86 ccw(c11543.43,15820.43) F1.2@11611.72,15752.14 ; F1.2@11640,15723.86 11141.14,15723.86 ; 10150,15760 C84.1@10595,15760 11095,15760 C42.1@11100,15765 11141.14,15723.86
  Bottom Layer w70: C17.1@10775,12360 10485,12360 C16.2@10460,12385 10130,12385 U4.1@9925,12590 9815,12590 9705,12700 9705,14340 U2.1@9940,14575 10110,14405 C3.2@10455,14405 10650,14405 C6.1@10685,14370 C7.1@11170,14370
-15V_C: C78.2 C80.1 C82.2 C86.2 C88.1 C89.1 P6.3 P7.3 P8.3 U17.C U18.C U19.C | length 6554.4
  Top Layer w50: U18.C@22702.13,9695.98 22755.98,9695.98 22940,9880 23070,9880 23690,10500 23920,10500 ; U19.C@22712.13,13555.98 22890,13733.86 23248.86,13733.86 23680,14165 P8.3@24010,14165 23915,14260 C88.1@23915,14545 23915,14705.12 C86.2@23919.88,14710 ; U17.C@22772.13,6090.98 22820.98,6090.98 23380,6650 23380,6935 23640.12,7195.12 C78.2@23640.12,7400 ; C80.1@23630,7555 23640.12,7544.88 C78.2@23640.12,7400 ; C82.2@23809.88,10925 23809.88,10764.88 C89.1@23805,10760 23805,10615 23920,10500 ; P6.3@23980,7180 23760,7400 C78.2@23640.12,7400 ; P7.3@24025,10500 23920,10500
A_CURRENT: P6.2 U17.0 | length 2236.4
  Top Layer w50: U17.0@22772.13,5890.98 23535.98,5890.98 24175,6530 24175,6850 24045,6980 P6.2@23980,6980
B_CURRENT: P7.2 U18.0 | length 1718.3
  Bottom Layer w50: U18.0@22702.13,9495.98 22990.98,9495.98 23805,10310 24015,10310 P7.2@24025,10300 ; 23966.17,10310 cw(c23966.17,10241.17) P7.2@24014.84,10289.84
C_CURRENT: P8.2 U19.0 | length 1550.1
  Bottom Layer w50: U19.0@22712.13,13355.98 23170.98,13355.98 23780,13965 P8.2@24010,13965
GND: C1.1 C2.2 C3.1 C6.2 C7.2 C8.1 C9.2 C10.2 C14.2 C15.1 C16.1 C17.2 C18.2 C19.1 C20.2 C27.2 C31.1 C32.2 C39.2 C40.1 C41.2 C42.2 C43.1 C48.2 C49.1 C50.2 C55.2 C56.1 C57.2 C62.2 C66.2 C67.1 C84.2 C85.1 CON1.1 CON1.3 CON1.4 CON1.5 CON1.7 CON1.9 CON1.11 CON1.13 CON1.15 CON1.17 CON1.19 CON1.21 CON1.23 CON1.25 CON1.27 CON1.29 CON1.31 CON1.33 CON1.34 CON1.35 CON1.36 D5.A D8.A P1.1 P9.3 P10.3 R3.1 R9.1 U1.2 U2.3 U3.5 U4.3 U5.2 U7.5 U8.2 U10.5 U11.2 U12.5 U13.2 U14.5 U15.2 U16.5 | length 46718.7
  Top Layer w40: CON1.1@9740,9805 9750,9795 10620,9795 11780,8635 C48.2@11780,8490 ; CON1.19@9740,10705 CON1.21@9740,10805 CON1.23@9740,10905 ; v2(9830,10470) 10090,10470 v2(10110,10450) ; C14.2@12345,6715 12490,6715 U3.5@12495,6710 12495,6845 12895,7245 v3(12895,7615) ; v3@12884.39,7604.39 cw(c12858.79,7578.79) 12895,7578.79 cw(c12931.21,7578.79) v3@12905.61,7604.39 ; C40.1@13400,8615 13715,8615 13772.5,8557.5 ; C2.2@13824.34,7009.34 cw(c13774.47,6959.47) 13845,6959.47 cw(c13915.53,6959.47) C2.2@13865.66,7009.34 ; C2.2@13824.46,7050.78 ccw(c13774.89,7100.94) 13845.41,7100.52 ccw(c13915.94,7100.11) C2.2@13865.78,7050.54 ; U11.2@13830,8225 13830,8500 13772.5,8557.5 ; v3@13834.33,7869.46 cw(c13796.51,7832.07) 13849.69,7831.76 ; U1.2@13840,6200 13840,6380 13805,6415 C1.1@13805,6635 13845,6675 C2.2@13845,7030 13849.97,7879.97 v3@13850,7885 ; C41.2@13909.34,9004.34 cw(c13859.47,8954.47) 13930,8954.47 cw(c14000.53,8954.47) C41.2@13950.66,9004.34 ; C41.2@13930,9025 13930,8715 13772.5,8557.5
  Top Layer w50: CON1.34@9640,11405 CON1.33@9740,11405 ; CON1.36@9640,11505 CON1.35@9740,11505 CON1.33@9740,11405 ; CON1.29@9740,11205 CON1.31@9740,11305 CON1.33@9740,11405 ; v3@9890,12050 10125,12425 v3@10125,12685 ; v3@9899.75,12042.24 cw(c9940.95,12051.69) 9905.13,12074.14 ; v3(10030,10975) 10190,10815 v3(11415,10815) ; C48.2@11780,8490 11900,8490 U12.5@12005,8385 ; C27.2@12390,10285 12595,10285 U7.5@12610,10270 ; C55.2@12395,12805 12535,12805 U14.5@12560,12780 ; C39.2@12555,13895 12555,14045 12640,14145 U10.5@12775,14145 ; C62.2@12710,15405 12800,15495 U16.5@12995,15495 12995,15580 13065,15650 13555,15650 13665,15760 U15.2@13665,15875 13665,16130 ; C31.1@13140,14360 13590,14360 13710,14480 U8.2@13710,14635 ; 13362.43,12717.57 cw(c13464.85,12820) v2(13320,12820) 13270,12820 C49.1@13265,12815 13370,12710 13635,12710 ; 13497.5,16327.5 13660,16120 ; U5.2@13695,10665 13695,10520 13560,10385 C19.1@13560,10360 13935,9985 C20.2@13935,9885 ; U13.2@13710,12875 13710,12785 13635,12710 ; C50.2@13827.88,12077.12 ccw(c13786.55,12118.45) 13845,12118.45 ccw(c13903.45,12118.45) C50.2@13862.12,12077.12 ; C50.2@13845,12060 13845,12350 13635,12560 13635,12710 ; C20.2@13917.88,9902.12 ccw(c13876.55,9943.45) 13935,9943.45 ccw(c13993.45,9943.45) C20.2@13952.12,9902.12
  Top Layer w70: P10.3@9510,13940 9510,14380 9805,14675 U2.3@9940,14675 ; P9.3@9525,15935 C43.1@9960,15935 ; C43.1@9960,15940 10100,15940 C85.1@10110,15935 10135,15960 C84.2@10595,15960 ; P1.1@10485,16575 10485,16070 C84.2@10595,15960 ; C6.2@10685,14570 10705,14570 10885,14390 R3.1@10885,14005 D5.A@10885,13835 10885,13665 R9.1@10935,13615 ; C42.2@11100,15965 11095,15960 C84.2@10595,15960 ; C56.1@13035,16215 13035,16160 13335,16160 ; 13330,16160 13497.5,16327.5 C57.2@13670,16500
  Bottom Layer w40: CON1.4@9640,9905 CON1.3@9740,9905 ; CON1.1@9740,9805 CON1.3@9740,9905 ; CON1.11@9740,10305 CON1.9@9740,10205 CON1.7@9740,10105 ; CON1.13@9740,10410.31 9740,10465 ; CON1.19@9740,10705 CON1.17@9740,10605 CON1.15@9740,10505 9740,10465 ; CON1.23@9740,10905.15 CON1.25@9740,11005 CON1.27@9740,11105 CON1.29@9740,11205 ; v2(9830,10470) 9825,10465 9740,10465 ; v2(10110,10450) 10110,10195 10020,10105 CON1.7@9740,10105 ; 13830,7952.43 ccw(c13917.43,7952.43) v3@13855.61,7890.61 ; U11.2@13830,8225 13830,7895 v3(13845,7880) ; CON1.3@9740,9905 CON1.5@9740,10005 CON1.7@9740,10105
  Bottom Layer w50: C66.2@9805.26,12024.27 cw(c9767.28,11986.3) 9820.98,11986.3 cw(c9874.69,11986.3) C66.2@9836.71,12024.27 ; v3(9890,12040) 9835,12054.02 C66.2@9820.98,12040 9820.98,11955.98 C67.1@9720,11855 9880,11695 9880,11500 9785,11405 CON1.33@9740,11405 10030,11115 v3(10030,10975) ; v3(11415,10815) 11980,10815 12525,10270 U7.5@12610,10270 12730,10390 13600,10390 13695,10485 U5.2@13695,10665 13695,11350 13845,11500 C50.2@13845,12060 ; U12.5@12005,8385 12095,8385 12170,8310 12170,7950 12505,7615 v3(12895,7615) ; U14.5@12560,12780 12685,12905 13235,12905 v2(13320,12820) ; U10.5@12775,14145 12880,14145 12935,14090 12935,13645 13140,13440 13620,13440 ; 13694.78,13754.78 ccw(c13559.55,13890) C32.2@13750.79,13890 ; U13.2@13710,12875 13710,13110 13620,13200 13620,13440 ; U8.2@13710,14635 13710,14490 13775,14240 C32.2@13775,13890 13775,13835 ; C32.2@13757.88,13907.12 ccw(c13716.55,13948.45) 13775,13948.45 ccw(c13833.45,13948.45) C32.2@13792.12,13907.12 ; C32.2@13758.65,13872.14 cw(c13724.65,13835) 13775,13835 ; 13780.13,13840.13 ccw(c13730.26,13890) C32.2@13800.79,13890 ; C32.2@13791.35,13872.14 ccw(c13825.35,13835) 13775,13835 ; C50.2@13827.88,12042.88 cw(c13786.55,12001.55) 13845,12001.55 cw(c13903.45,12001.55) C50.2@13862.12,12042.88 ; C41.2@13912.88,9042.12 ccw(c13859.47,9095.53) 13935,9095.53 ; C20.2@13917.88,9867.88 cw(c13876.55,9826.55) 13935,9826.55 cw(c13993.45,9826.55) C20.2@13952.12,9867.88 ; C41.2@13930,9025 13935,9030 C20.2@13935,9885 ; 13620,13440 13620,13680 13775,13835
  Bottom Layer w70: U4.3@9925,12690 10290,12690 C16.1@10460,12520 10735,12520 C17.2@10775,12560 10785,12570 C18.2@10785,12850 ; U2.3@9940,14675 10320,14675 C3.1@10455,14540 10485,14570 C6.2@10685,14570 C9.2@10685,14890 ; C15.1@10455,12895 10740,12895 C18.2@10785,12850 ; C8.1@10470,14925 10505,14890 C9.2@10685,14890 ; P1.1@10485,16575 10490,16580 10490,16690 10610,16810 13485,16810 13670,16625 C57.2@13670,16500 ; C84.2@10595,15960 10730,15960 10745.81,15944.19 10745.81,15939.19 10910,15775 10910,14890 ; D8.A@10930,13455 10930,13255 10980,13205 10980,12940 10890,12850 C18.2@10785,12850 ; D8.A@10930,13460 R9.1@10935,13615 ; 11141.37,14890 ccw(c11141.37,14948.63) C10.2@11182.83,14907.17 ; C7.2@11170,14570 C10.2@11170,14900 ; C10.2@11180,14910 C10.2@11170,14900 ; C9.2@10685,14890 10910,14890 ; 10910,14890 11160,14890 C10.2@11170,14900
  other v3: 10125,12690
GND_C: C77.2 C78.1 C79.1 C80.2 C81.2 C82.1 C83.1 C86.1 C87.1 C88.2 C89.2 C90.2 | length 4603.4
  Top Layer w50: v6(23495,7380) 23515,7400 C78.1@23529.88,7400 23495,7434.88 C80.2@23495,7555 ; v6(23535,6605) C79.1@23535,6555 23535,6434.88 C77.2@23569.88,6400 ; C82.1@23920.12,10925 23970,10875.12 23970,10790 C89.2@23940,10760 24100,10760 24210,10650 24210,10015 C83.1@23990,9795 23990,9674.88 C81.2@23955.12,9640 ; C90.2@24000.12,13125 24000.12,13315.12 C87.1@24015,13330 24215,13530 24215,14380 C88.2@24050,14545 24030.12,14564.88 C86.1@24030.12,14710
  Bottom Layer w50: v6(23495,7380) 23495,6645 v6(23535,6605)
NetC4_1: C4.1 C12.1 R5.2 R6.2 U1.8 U1.12 | length 3942.2
  Top Layer w50: R6.2@13155,6445 13155,6255 13380,6030 14340,6030 14440,6130 U1.8@14440,6200 14440,6280 14525,6365 14750,6365 14840,6275 U1.12@14840,6200 14840,6085 C12.1@15055,5870 ; R6.2@13160,6450 R5.2@13160,6630
  Bottom Layer w50: C4.1@14267.88,7062.88 cw(c14226.55,7021.55) 14285,7021.55 cw(c14343.45,7021.55) C4.1@14302.12,7062.88 ; C4.1@14285,7080 14285,6355 U1.8@14440,6200
NetC4_2: C4.2 C11.1 D3.1 DD1.C Q1.3 R2.1 U1.9 U17.1 | length 10725.7
  Top Layer w78.74: D3.1@15840,6345 16015,6345 R2.1@16020,6350
  Top Layer w196.85: DD1.C@20875,6560 21920,6560 22190,6830 v1@22525,6830
  Bottom Layer w50: C4.2@14467.88,7062.88 cw(c14426.55,7021.55) 14485,7021.55 cw(c14543.45,7021.55) C4.2@14502.12,7062.88 ; C4.2@14485,7080 14485,6380 14540,6325 U1.9@14540,6200
  Bottom Layer w78.74: C4.2@14485,7080 C11.1@14905,7080 14905,7205 15040,7340 15395,7340 15700,7035 15700,6485 D3.1@15840,6345 ; R2.1@16020,6350 16310,6350 17070,7110 19160,7110 Q1.3@19670,6600 ; 19589.87,6680.13 cw(c19468.09,6558.35) Q1.3@19640.31,6558.35
  Bottom Layer w196.85: Q1.3@19670,6600 19699.64,6599.02 19730.43,6597.99 19731.43,6597.96 DD1.C@20875,6560
  other v1: 19605,6525 19595,6545 19730,6555 19570,6565 19595,6580 19730,6585 19575,6605 19700,6610 19610,6615 19640,6625 19670,6625 19585,6640 19620,6655 19655,6660 22490,6755 22580,6765 22455,6770 22485,6795 22605,6795 22575,6800 22510,6815 22545,6820 22480,6830 22585,6835 22515,6850 22550,6855
NetC11_2: C11.2 C13.1 D4.A U1.10 | length 1208.3
  Bottom Layer w50: U1.10@14640,6200 14645,6210 C13.1@14645,6455 ; C13.1@14650,6455 14650,6525 14750,6625 D4.A@14830,6625 15105,6900 C11.2@15105,7080 ; C11.2@15087.88,7062.88 cw(c15046.55,7021.55) 15105,7021.55 cw(c15163.45,7021.55) C11.2@15122.12,7062.88
NetC12_2: C12.2 U1.16 | length 350.7
  Top Layer w50: C12.2@15190,5870 15240,5920 U1.16@15240,6200
NetC13_2: C13.2 R7.2 U1.14 | length 484.9
  Bottom Layer w50: C13.2@14785,6455 R7.2@14990,6455 14990,6375 15045,6320 15045,6205 U1.14@15040,6200
NetC21_1: C21.1 C23.1 R13.2 R14.2 U5.8 U5.12 | length 3776.2
  Top Layer w50: R13.2@13325,10010 13325,9820 R14.2@13320,9815 13365,9815 13560,9620 14235,9620 14340,9725 C21.1@14340,9890 14295,9935 U5.8@14295,10665 14295,10740 14370,10815 14645,10815 14695,10765 U5.12@14695,10665 14695,10580 14870,10405 C23.1@14965,10405 ; 14295,9936.38 ccw(c14386.38,9936.38) C21.1@14321.77,9871.77 ; 14295,10057.09 ccw(c14507.09,10057.09) C21.1@14357.12,9907.12 ; C21.1@14315.79,9890 ccw(c14257.33,9890) 14298.67,9931.33 ccw(c14340,9972.67) C21.1@14340,9914.21 ; C21.1@14322.88,9872.88 cw(c14281.55,9831.55) 14340,9831.55 cw(c14398.45,9831.55) C21.1@14357.12,9872.88
NetC21_2: C21.2 C22.1 D11.1 DD2.C Q2.3 R11.1 U5.9 U18.1 | length 10057.4
  Top Layer w50: U5.9@14395,10665 14395,10390 14540,10245 C21.2@14540,9890 14545,9895 C22.1@14965,9895 14965,9820 15125,9660 D11.1@15695,9660 R11.1@15880,9660 ; C21.2@14522.88,9907.12 ccw(c14481.55,9948.45) 14540,9948.45 ccw(c14598.45,9948.45) C21.2@14557.12,9907.12 ; C21.2@14557.12,9872.88 cw(c14610.53,9819.47) 14610.53,9895 ; C22.1@14947.88,9912.12 cw(c14906.55,9953.45) 14906.55,9895 cw(c14906.55,9836.55) 14947.88,9877.88 cw(c14906.55,9836.55) 14965,9836.55 cw(c15023.45,9836.55) C22.1@14982.12,9877.88
  Top Layer w78.74: R11.1@15880,9660 15995,9660 v7(17170,10835)
  Top Layer w196.85: DD2.C@20845,10290 22400.78,10431.43 22403.03,10431.64 22428.28,10433.93 22430.53,10434.14 v1@22440,10435
  Bottom Layer w78.74: v7(17170,10835) 19135,10835 Q2.3@19655,10315 ; 19574.87,10395.13 cw(c19453.09,10273.35) Q2.3@19625.31,10273.35
  Bottom Layer w196.85: Q2.3@19655,10315 19694.67,10314.17 19696.66,10314.12 19720.42,10313.63 19721.23,10313.61 DD2.C@20845,10290
  other v1: 19695,10235 19580,10255 19720,10255 19720,10293.42 19570,10295 19590,10325 19695,10330 19620,10345 19655,10345 22410,10355 22515,10370 22405,10385 22500,10405 22530,10410 22430,10415 22470,10420 22430,10440 22505,10440 22470,10455